# Altium PCB bridge (2).PcbDoc
Units mm, origin at the board's own origin, x right, y up, seen from the top; angles counter-clockwise.
Board outline 43.02 x 49.94 mm, 4 copper layers (Top Layer, Internal Plane 1, Internal Plane 2, Bottom Layer), stack 0.758 mm thick; 45 components, 64 nets, 108 pads, 354 vias.
Unrouted connection lines stored in the file: 5.
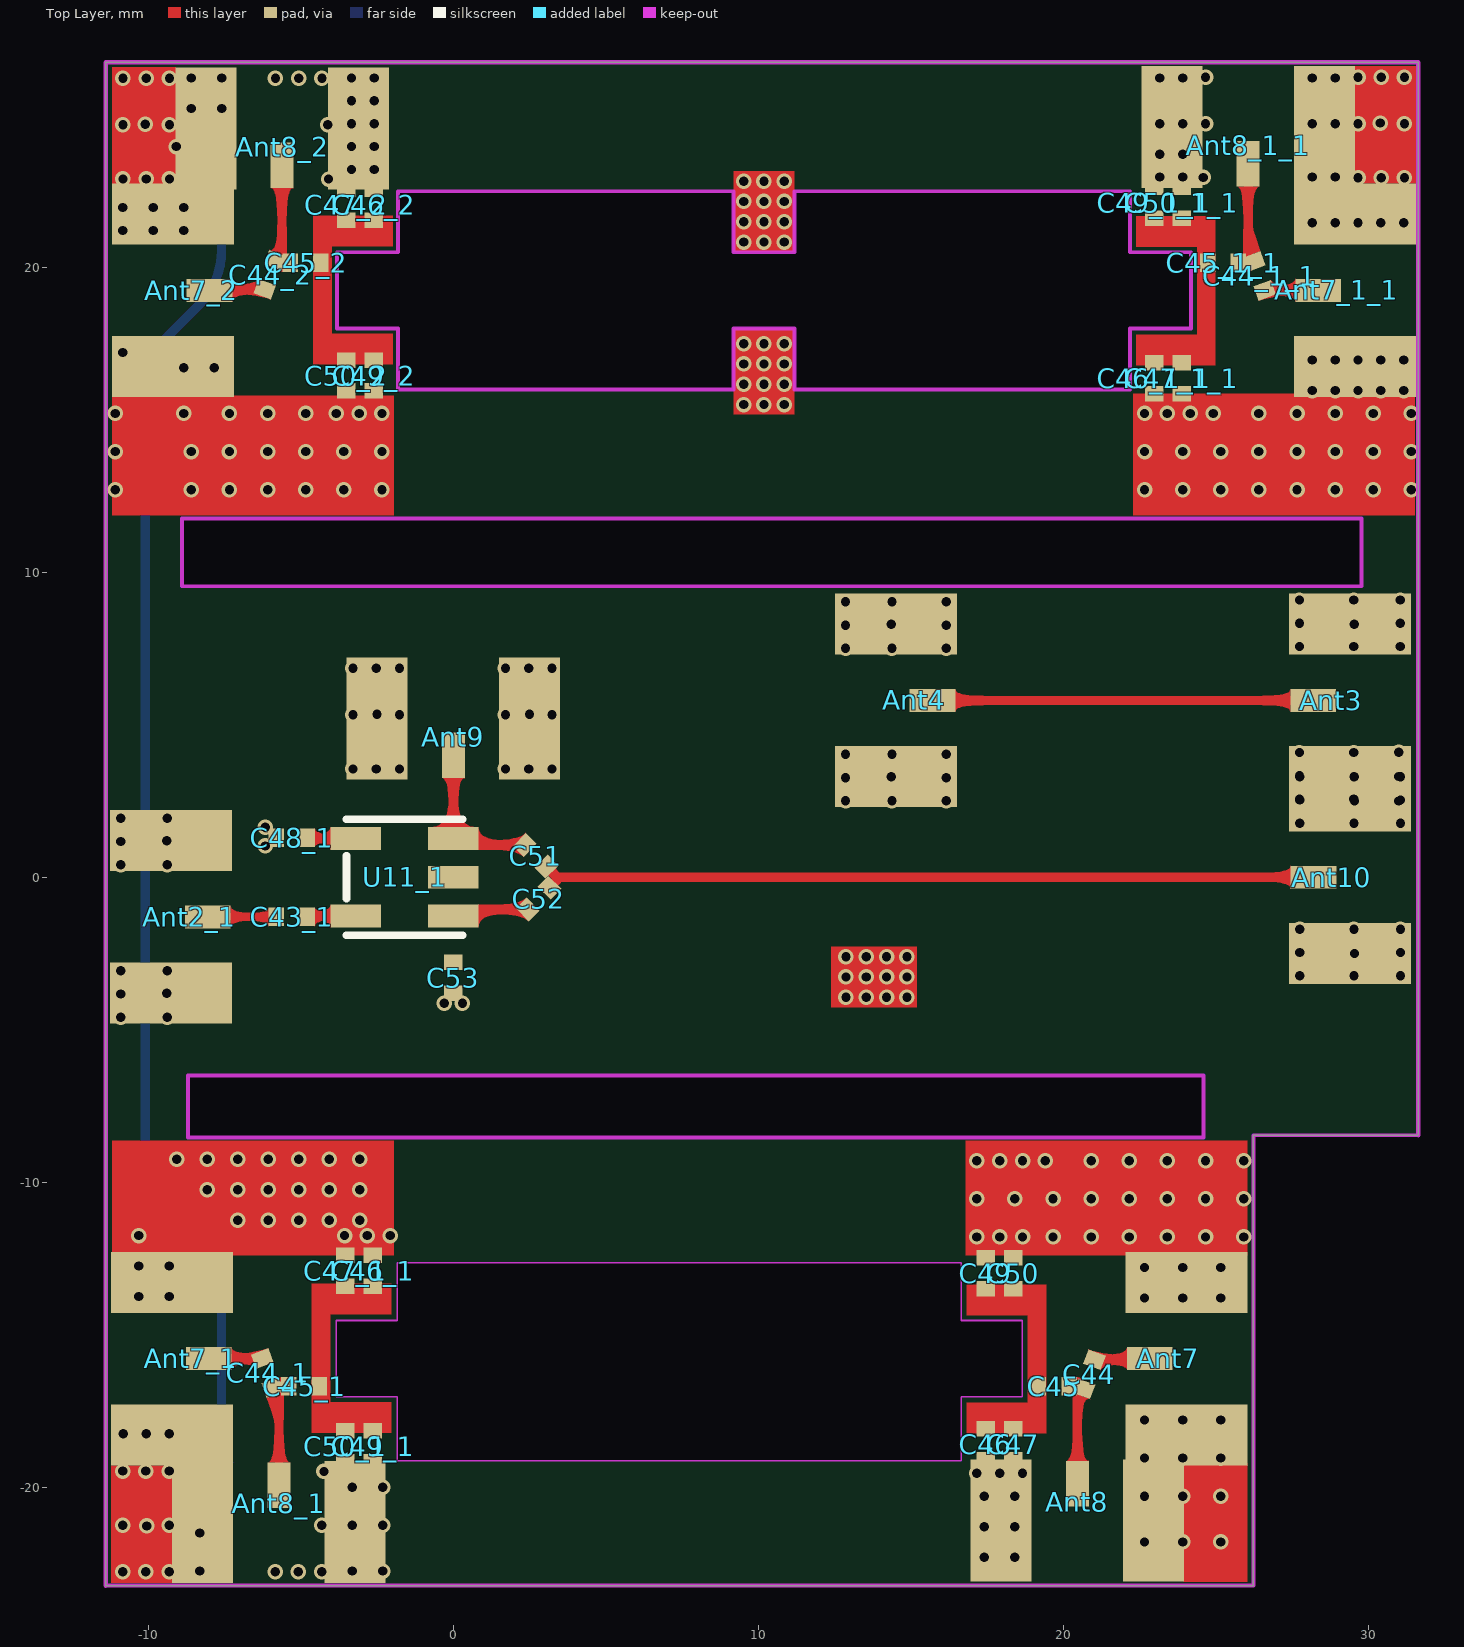
[diagram p0: Top Layer view]
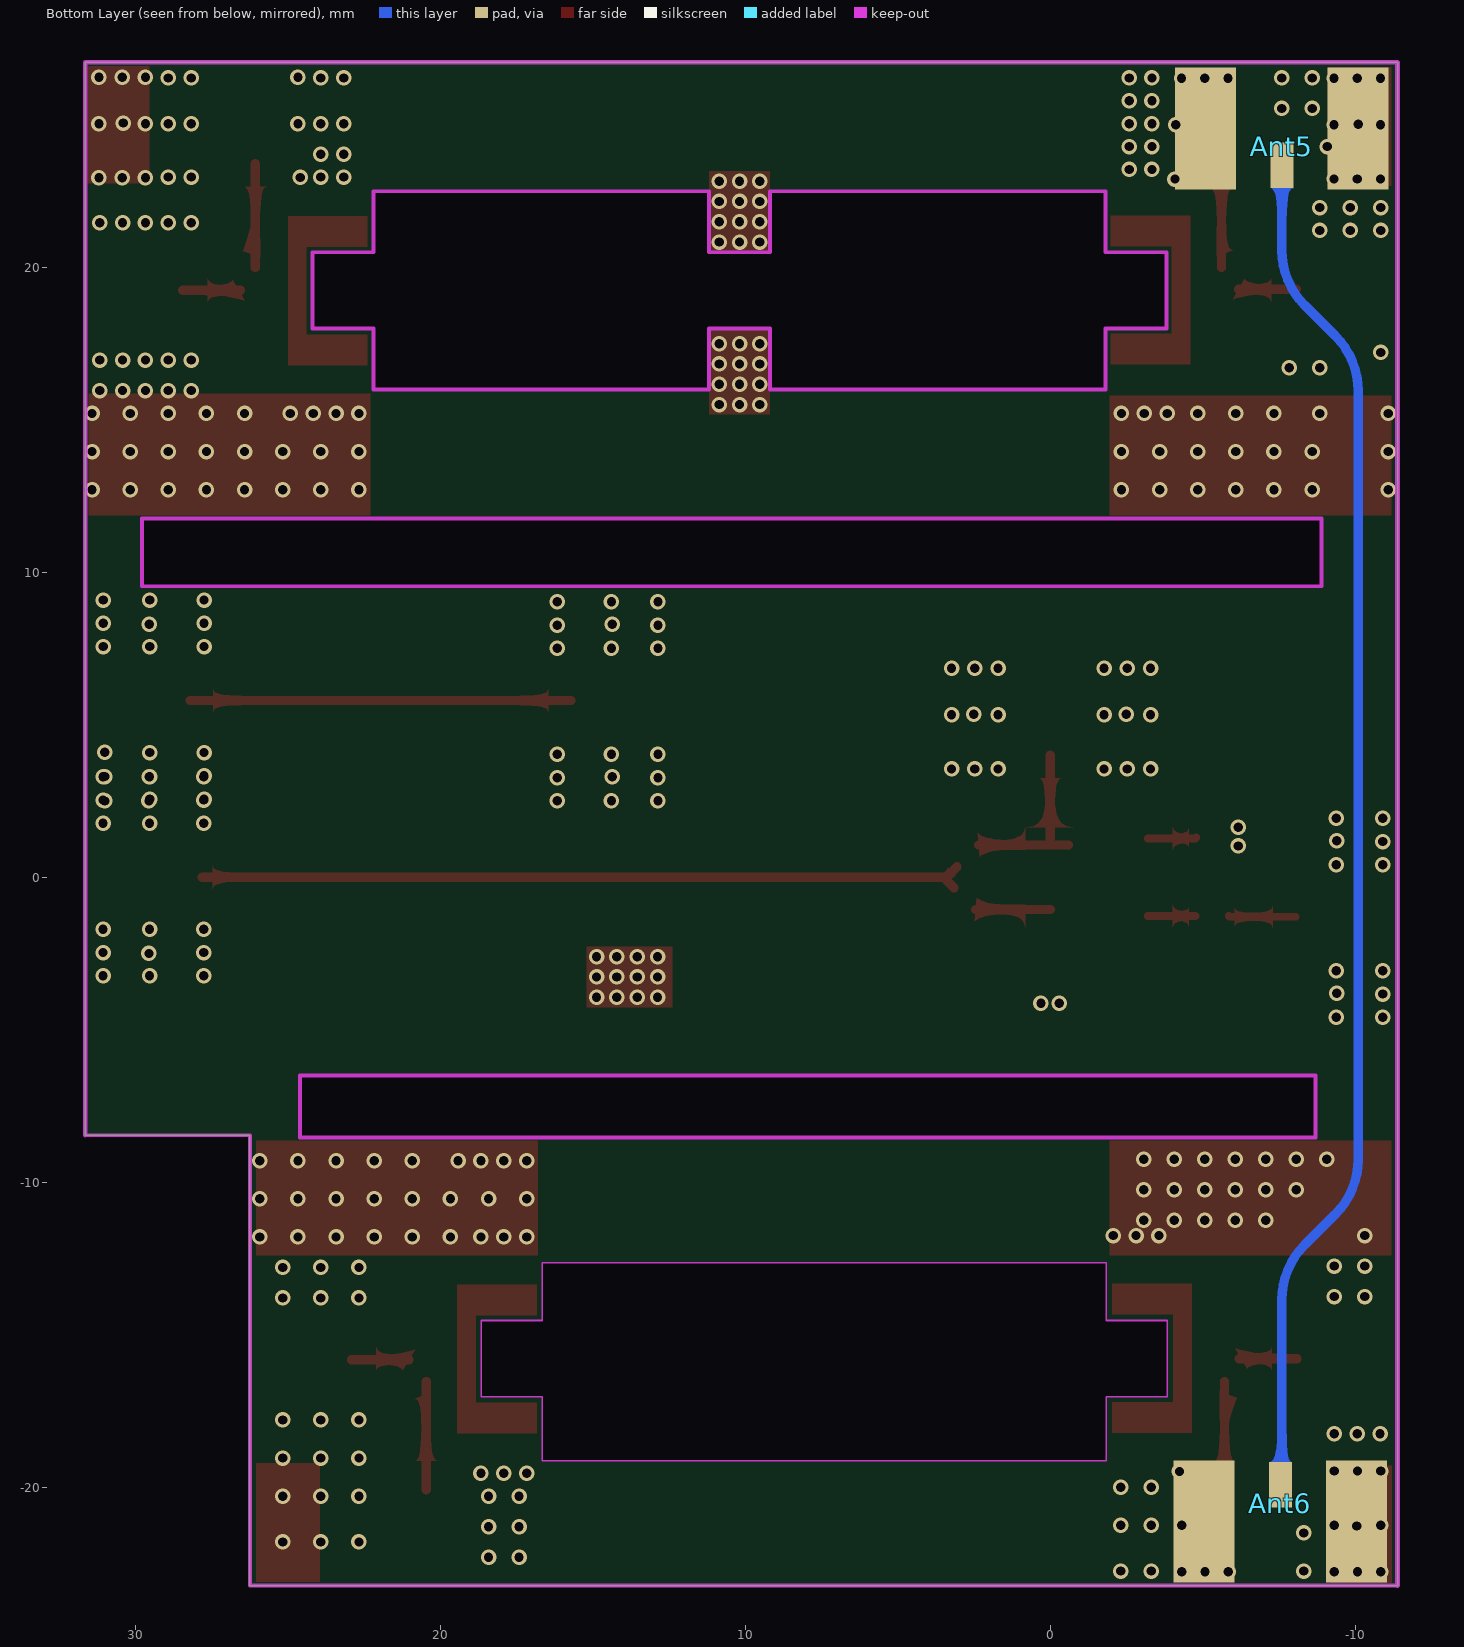
[diagram p1: Bottom Layer view, seen from below]
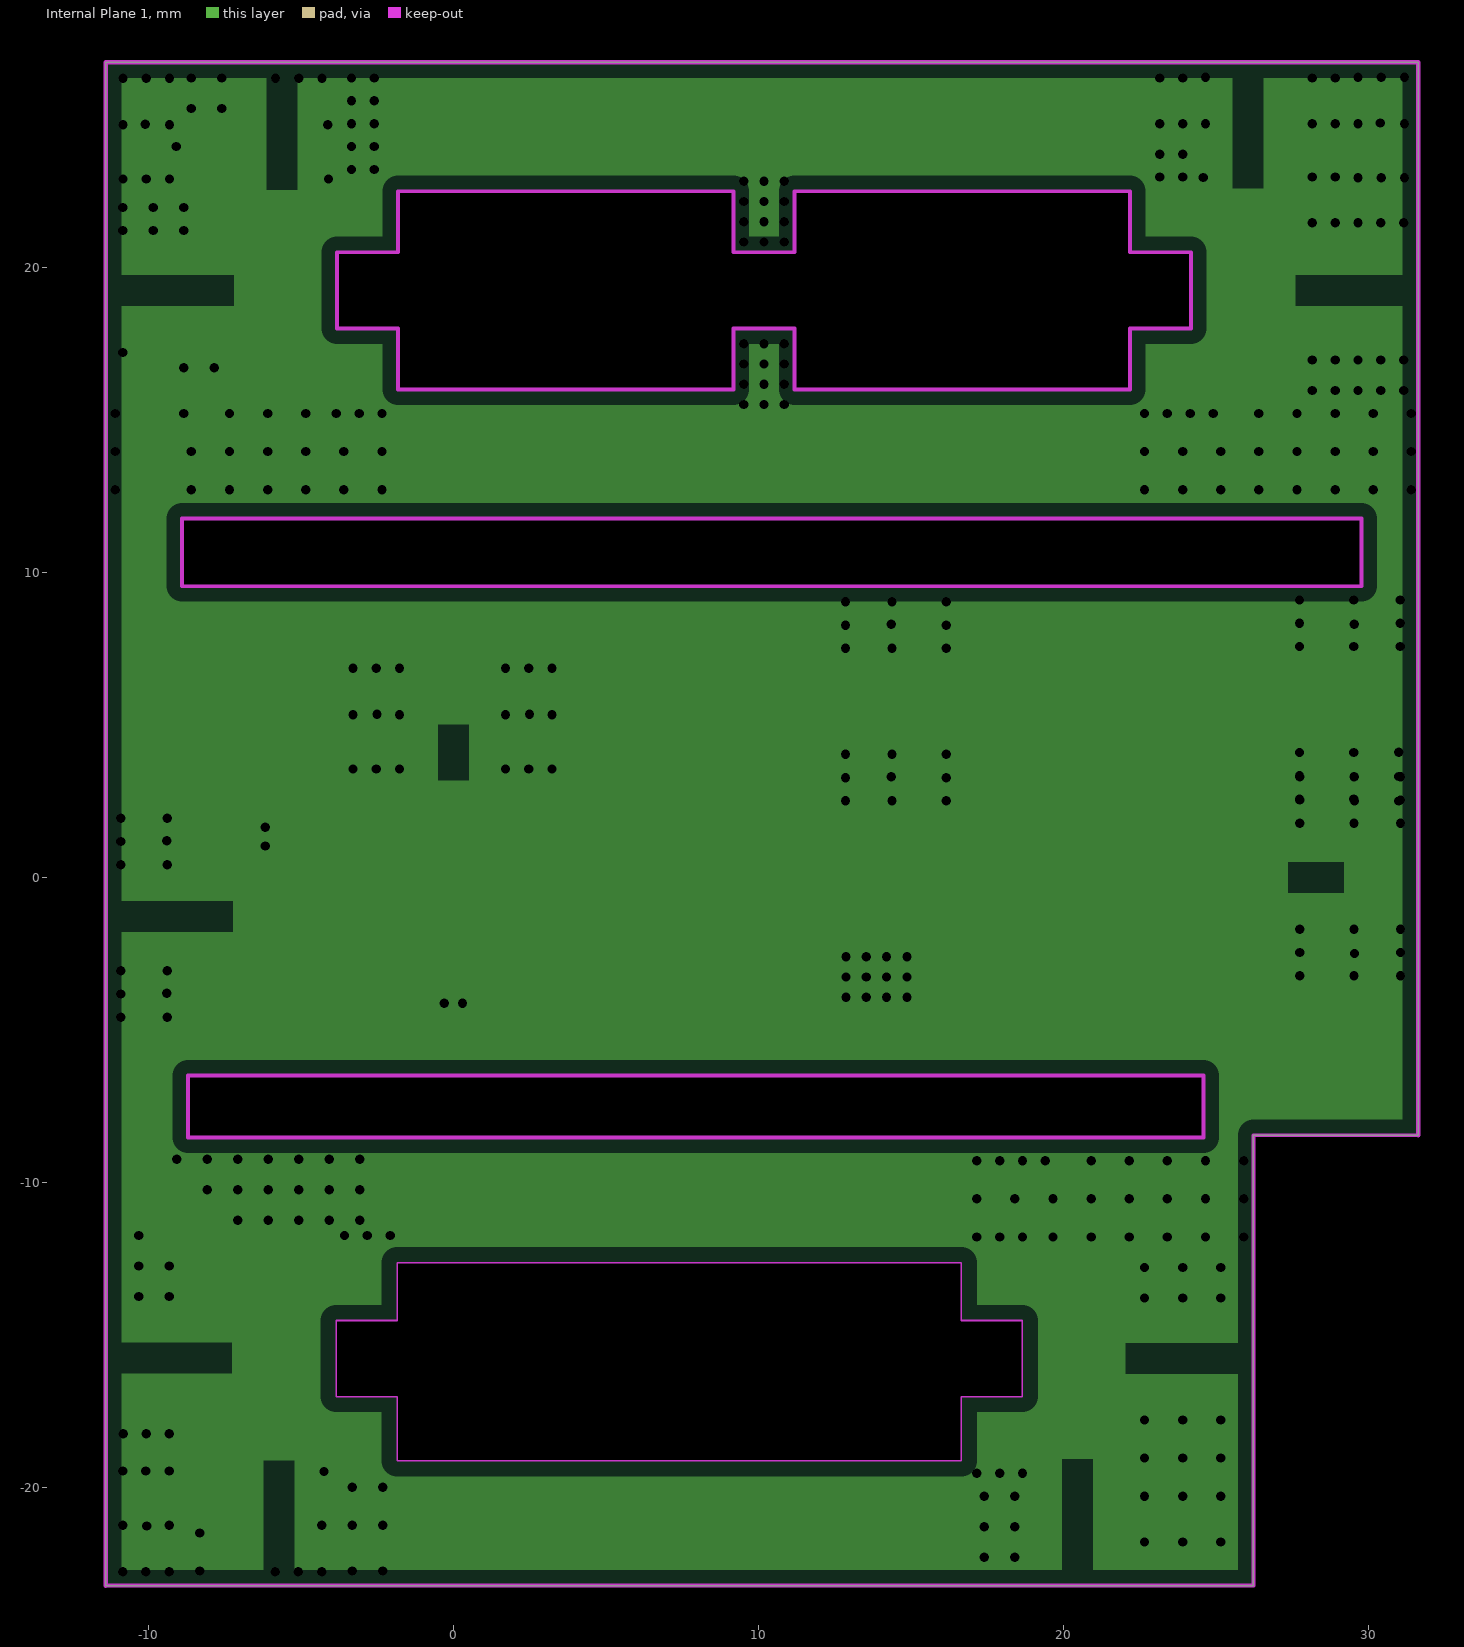
[diagram p2: Internal Plane 1, clearances drawn from the general rule]
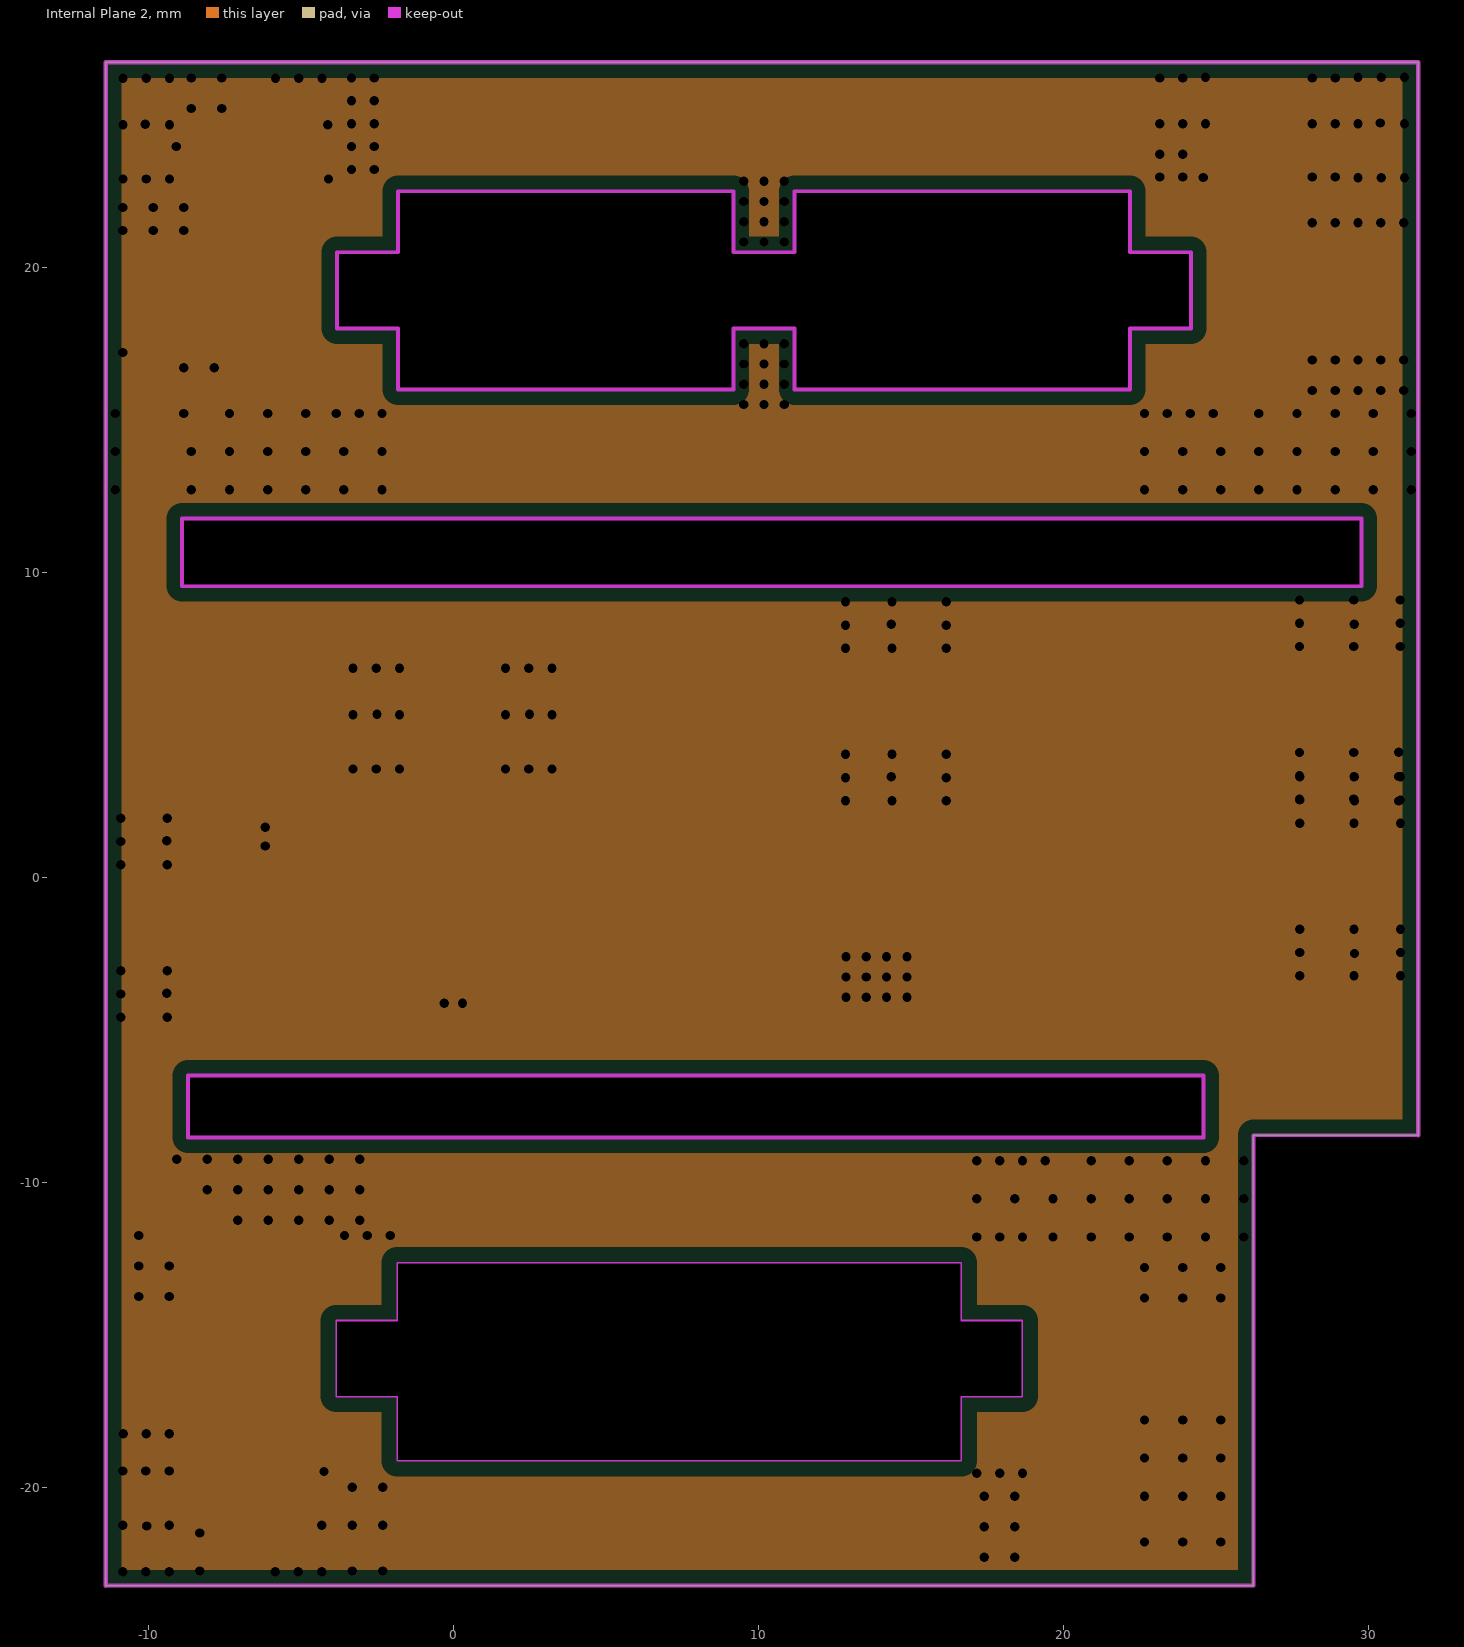
[diagram p3: Internal Plane 2, clearances drawn from the general rule]

## Layer stack, top to bottom
Top Solder: solder mask 0.0102, Solder Resist, Dk 3.8
Top Layer: signal copper 0.0356
Dielectric 1: prepreg 0.1803, Dk 4.6
Internal Plane 1: plane copper 0.036, net GND
Dielectric 3: core 0.254, Dk 4.6
Internal Plane 2: plane copper 0.036, net GND
Dielectric 4: prepreg 0.1803, Dk 4.6
Bottom Layer: signal copper 0.0356
Bottom Solder: solder mask 0.0102, Solder Resist, Dk 3.8

## Board outline
-11.391,-23.227 -11.391,26.717 31.634,26.717 31.634,-8.458 26.234,-8.458 26.234,-23.227
cut-out: 24.184,17.992 22.184,17.992 22.184,15.992 11.184,15.992 11.184,17.992 9.184,17.992 9.184,15.992 -1.816,15.992 -1.816,17.992 -3.816,17.992 -3.816,20.492 -1.816,20.492 -1.816,22.492 9.184,22.492 9.184,20.492 11.184,20.492 11.184,22.492 22.184,22.492 22.184,20.492 24.184,20.492
cut-out: -3.841,-17.033 -3.841,-14.533 -1.841,-14.533 -1.841,-12.633 16.659,-12.633 16.659,-14.533 18.659,-14.533 18.659,-17.033 16.659,-17.033 16.659,-19.133 -1.841,-19.133 -1.841,-17.033
cut-out: -8.7,-8.533 24.6,-8.533 24.6,-6.5 -8.7,-6.5
cut-out: -8.9,9.542 29.775,9.542 29.775,11.767 -8.9,11.767

## Design rules (kind name [scope] priority, off if disabled: settings)
Clearance [All] p1: gap=0.152 ignorepadtopadclearanceinfootprint=FALSE except(0: Arc-Hole Track-Hole SMDPad-Hole THPad-Hole Via-Hole Fill-Hole Poly-Hole Region-Hole Text-Hole)
DiffPairsRouting [All] p1: maxlimit=0.254 minlimit=0.254 mostfreqgap=0.254 toplayer_minwidth=0.152 toplayer_maxwidth=0.381 toplayer_prefwidth=0.381 bottomlayer_minwidth=0.152 bottomlayer_maxwidth=0.381 bottomlayer_prefwidth=0.381 maxuncoupledlength=12.7
MinimumSolderMaskSliver [All] p1 off: minsoldermaskwidth=0.254
PlaneClearance [All] p1: clearance=0.254
PlaneConnect [All] p1: planeconnectstyle=Direct reliefexpansion=0.508 reliefentries=4 reliefconductorwidth=0.254 reliefairgap=0.254
PolygonConnect [All] p1: connectstyle=Direct reliefconductorwidth=0.254 reliefentries=4 polygonreliefangle="90 Angle" airgapwidth=0.254
RoomDefinition mixer [InComponentClass('mixer')] p1 off: confinementstyle=ConfineIn formatcopy=TRUE lockcomponents=FALSE outline 38.622,20.131 177.534,20.131 177.534,30.164 38.622,30.164
RoomDefinition power [InComponentClass('power')] p2 off: confinementstyle=ConfineIn formatcopy=TRUE lockcomponents=FALSE outline 38.52,-21.703 98.083,-21.703 98.083,-15.607 38.52,-15.607
RoutingVias [All] p1: holewidth=0.305 width=0.508 viastyle="Through Hole" minholewidth=0.3 minwidth=0.5 maxholewidth=0.711 maxwidth=1.27
SilkToBoardRegionClearance [All] p1 off:
SilkToSilkClearance [All] p1 off: silktosilkclearance=0.254
SilkToSolderMaskClearance [IsPad] p1 off: minsilkscreentomaskgap=0.254 clearancetoexposedcopper=TRUE
SolderMaskExpansion [All] p1: expansion=0.102
Width [All] p1: maxlimit=1.524 minlimit=0.152 preferedwidth=0.152
23 further rules are at their usual default settings.

## Classes and differential pairs
component class mixer: R28
differential pair IF1: +IF1_P -IF1_N
differential pair IF2: +IF2_P -IF2_N

## Components (designator, comment, footprint, x,y, rotation, side; value= is the part's Value field where it differs from the comment)
Ant2_1 "Antenna" SMA-2 -9.252,1.2 r270 top (schematic designator Ant2)
Ant3 "Antenna" SMA-2 29.391,3.295 r90 top (schematic designator Ant2)
Ant4 "Antenna" SMA-2 14.509,8.295 r270 top (schematic designator Ant2)
Ant5 "Antenna" SMA-2 -10.098,24.544 r0 bottom (schematic designator Ant2)
Ant6 "Antenna" SMA-2 -5.051,-21.121 r180 bottom (schematic designator Ant2)
Ant7 "Antenna" SMA-2 24.034,-18.283 r90 top (schematic designator Ant2)
Ant7_1 "Antenna" SMA-2 -9.216,-13.283 r270 top (schematic designator Ant2)
Ant7_1_1 "Antenna" SMA-2 29.559,16.742 r90 top (schematic designator Ant2)
Ant7_2 "Antenna" SMA-2 -9.191,21.742 r270 top (schematic designator Ant2)
Ant8 "Antenna" SMA-2 17.959,-21.083 r0 top (schematic designator Ant2)
Ant8_1 "Antenna" SMA-2 -8.216,-21.133 r0 top (schematic designator Ant2)
Ant8_1_1 "Antenna" SMA-2 28.559,24.592 r180 top (schematic designator Ant2)
Ant8_2 "Antenna" SMA-2 -3.116,24.542 r180 top (schematic designator Ant2)
Ant9 "Antenna" SMA-2 2.5,5.2 r180 top (schematic designator Ant2)
Ant10 "Antenna" SMA-2 29.4,-2.5 r90 top (schematic designator Ant2)
C43_1 "1nF" 0402 -5.3,-1.3 r0 top (schematic designator C43)
C44 "1nF" 0402 20.85,-16.291 r250 top (schematic designator C43)
C44_1 "1nF" 0402 -6.091,-16.258 r110 top (schematic designator C43)
C44_1_1 "1nF" 0402 26.434,19.717 r290 top (schematic designator C43)
C44_2 "1nF" 0402 -6.007,19.75 r70 top (schematic designator C43)
C45 "1nF" 0402 19.684,-16.683 r0 top (schematic designator C43)
C45_1 "1nF" 0402 -4.891,-16.683 r180 top (schematic designator C43)
C45_1_1 "1nF" 0402 25.234,20.142 r0 top (schematic designator C43)
C45_2 "1nF" 0402 -4.841,20.142 r180 top (schematic designator C43)
C46 "1nF" 0402 17.459,-18.583 r270 top (schematic designator C43)
C46_1 "1nF" 0402 -2.641,-12.908 r90 top (schematic designator C43)
C46_1_1 "1nF" 0402 22.984,16.367 r270 top (schematic designator C43)
C46_2 "1nF" 0402 -2.616,22.042 r90 top (schematic designator C43)
C47 "1nF" 0402 18.359,-18.583 r270 top (schematic designator C43)
C47_1 "1nF" 0402 -3.541,-12.908 r90 top (schematic designator C43)
C47_1_1 "1nF" 0402 23.884,16.367 r270 top (schematic designator C43)
C47_2 "1nF" 0402 -3.516,22.042 r90 top (schematic designator C43)
C48_1 "10nF" 0402 -5.3,1.3 r0 top (schematic designator C48)
C49 "1nF" 0402 17.459,-12.983 r270 top (schematic designator C43)
C49_1 "1nF" 0402 -2.641,-18.659 r90 top (schematic designator C43)
C49_1_1 "1nF" 0402 22.984,22.118 r270 top (schematic designator C43)
C49_2 "1nF" 0402 -2.616,16.442 r90 top (schematic designator C43)
C50 "1nF" 0402 18.359,-12.983 r270 top (schematic designator C43)
C50_1 "1nF" 0402 -3.541,-18.659 r90 top (schematic designator C43)
C50_1_1 "1nF" 0402 23.884,22.118 r270 top (schematic designator C43)
C50_2 "1nF" 0402 -3.516,16.442 r90 top (schematic designator C43)
C51 "1nF" 0402 2.7,0.7 r135 top (schematic designator C43)
C52 "1nF" 0402 2.8,-0.7 r225 top (schematic designator C43)
C53 "1nF" 0402 0,-3.3 r90 top (schematic designator C43)
U11_1 "TCM1-1-13M+" TCM-63AX+ -1.6,0 r270 top (schematic designator U11)

## Footprints (in the part's own frame and the unit in brackets; to place one, negate y for a bottom-side part, rotate by r counter-clockwise, add the part's x,y. Pads: shape width x height; smd on the part's side, far side on the other; paste and mask are expansions set on the pad)
0402 [mil] "0402-RES"
  rect 20x24 smd: 1(-19.68,0) 2(20,0)
SMA-2 [mm]
  rect 0.75x1.5 smd: 1(2.5,1.2)
  rect 2x4 smd: GND(0,0) GND(5,0)
  Top Layer pour cut-out: 1,2 4,2 4,-2 1,-2
TCM-63AX+ [mm]
  rect 0.75x1.65 smd: 1(-1.27,1.6) 2(0,1.6) 3(1.27,1.6) 4(1.27,-1.6) 5(-1.27,-1.6)
  silkscreen extent -1.9,-1.9 1.9,1.9

## Part data
C43_1 C44 C44_1 C44_1_1 C44_2 C45 C45_1 C45_1_1 C45_2 C46 C46_1 C46_1_1 C46_2 C47 C47_1 C47_1_1 C47_2 C48_1 C49 C49_1 C49_1_1 C49_2 C50 C50_1 C50_1_1 C50_2 C51 C52 C53: library part CAP0402-CAP, "<b>Capacitor</b> / Standard 0603 ceramic capacitor, and 0.1\" leaded capacitor."
U11_1: library part TCM-63AX+

## Via types
v1: diameter 0.508, hole 0.305, Top Layer to Bottom Layer, tented both sides, 354 vias

## Nets (pads, with @x,y where several pads share a name; then routed paths per layer and width w, separated by ;. In a path a pad name is that pad's centre, name@x,y a point inside that pad or via, vN(x,y) a via of type N, cw(c..) or ccw(c..) an arc to the next point about the centre after c; other vN are vias at no path point)
5V: Ant3.1 Ant4.1 Ant8.1 C44.2 C45.2 | length 16
  Top Layer w0.305: Ant4.1 Ant3.1 ; Ant8.1@20.459,-20.083 C44.2@20.459,-16.533
5V-MIXER: Ant7_1_1.1 C44_1_1.2 | length 1.9
  Top Layer w0.305: C44_1_1.2@26.546,19.242 Ant7_1_1.1@28.434,19.242
5VA: Ant7_1.1 C44_1.2 | length 1.9
  Top Layer w0.305: Ant7_1.1@-8.091,-15.783 C44_1.2@-6.203,-15.783
5VB: C46_1.1 C47_1.1 C49_1.2 C50_1.2
6V: C45.1 C46.1 C47.1 C49.2 C50.2
-3.3V: Ant5.1 Ant6.1 Ant7.1 C44.1 | length 46.8
  Top Layer w0.305: C44.1 Ant7.1@22.909,-15.821
  Bottom Layer w0.254: Ant6.1@-7.598,-19.874 ccw(c-7.551,-19.874) Ant6.1
  Bottom Layer w0.305: Ant6.1@-7.598,-19.874 -7.598,-13.854 ccw(c-10.138,-13.854) -8.342,-12.058 -9.356,-11.044 cw(c-7.56,-9.248) -10.1,-9.248 -10.1,15.948 cw(c-7.56,15.948) -9.356,17.744 -8.342,18.758 ccw(c-10.138,20.554) -7.598,20.554 Ant5.1
DETO: Ant8_1.1 Ant8_1_1.1 C44_1.1 C44_1_1.1 C44_2.2 C45_1.2 C45_1_1.2 C45_2.2 | length 10.3
  Top Layer w0.305: Ant8_1.1 C44_1.1@-5.716,-16.533 ; C44_2.2@-5.616,19.992 -5.616,23.542 ; C44_1_1.1@26.059,19.992 Ant8_1_1.1
GND: Ant2_1.GND Ant3.GND Ant4.GND Ant5.GND Ant6.GND Ant7.GND Ant7_1.GND Ant7_1_1.GND Ant7_2.GND Ant8.GND Ant8_1.GND Ant8_1_1.GND Ant8_2.1 Ant8_2.GND Ant9.GND Ant10.GND C46.2 C46_1.2 C46_1_1.2 C46_2.2 C47.2 C47_1.2 C47_1_1.2 C47_2.2 C48_1.1 C49.1 C49_1.1 C49_1_1.1 C49_2.1 C50.1 C50_1.1 C50_1_1.1 C50_2.1 C53.1
  other v1: -10.842,-22.772 -10.08,-22.772 -9.318,-22.772 -5.842,-22.772 -5.08,-22.772 -4.318,-22.772 -8.318,-22.748 -3.318,-22.748 -2.318,-22.748 17.411,-22.293 18.411,-22.293 22.661,-21.793 23.911,-21.793 25.161,-21.793 -8.318,-21.498 17.411,-21.293 18.411,-21.293 -10.051,-21.269 -10.842,-21.248 -9.318,-21.248 -4.318,-21.248 -3.318,-21.248 -2.318,-21.248 17.411,-20.293 18.411,-20.293 22.661,-20.293 23.911,-20.293 25.161,-20.293 -3.318,-19.998 -2.318,-19.998 17.161,-19.543 17.911,-19.543 18.661,-19.543 -4.241,-19.483 -10.842,-19.47 -10.08,-19.47 -9.318,-19.47 22.661,-19.043 23.911,-19.043 25.161,-19.043 -10.818,-18.248 -10.068,-18.248 -9.318,-18.248 22.661,-17.793 23.911,-17.793 25.161,-17.793 22.661,-13.793 23.911,-13.793 25.161,-13.793 -10.318,-13.748 -9.318,-13.748 22.661,-12.793 23.911,-12.793 25.161,-12.793 -10.318,-12.748 -9.318,-12.748 17.161,-11.793 17.911,-11.793 18.661,-11.793 19.661,-11.793 20.911,-11.793 22.161,-11.793 23.411,-11.793 24.661,-11.793 25.911,-11.793 -10.318,-11.748 -3.568,-11.748 -2.818,-11.748 -2.068,-11.748 -7.068,-11.248 -6.068,-11.248 -5.068,-11.248 -4.068,-11.248 -3.068,-11.248 17.161,-10.543 18.411,-10.543 19.661,-10.543 20.911,-10.543 22.161,-10.543 23.411,-10.543 24.661,-10.543 25.911,-10.543 -8.068,-10.248 -7.068,-10.248 -6.068,-10.248 -5.068,-10.248 -4.068,-10.248 -3.068,-10.248 17.161,-9.293 17.911,-9.293 18.661,-9.293 19.411,-9.293 20.911,-9.293 22.161,-9.293 23.411,-9.293 24.661,-9.293 25.911,-9.293 -9.068,-9.248 -8.068,-9.248 -7.068,-9.248 -6.068,-9.248 -5.068,-9.248 -4.068,-9.248 -3.068,-9.248 -10.903,-4.591 -9.379,-4.591 -0.3,-4.133 0.3,-4.133 12.873,-3.937 13.539,-3.937 14.205,-3.937 14.871,-3.937 -10.903,-3.829 -9.4,-3.8 12.873,-3.271 13.539,-3.271 14.205,-3.271 14.871,-3.271 27.749,-3.233 29.527,-3.233 31.051,-3.233 -10.903,-3.067 -9.379,-3.067 12.873,-2.605 13.539,-2.605 14.205,-2.605 14.871,-2.605 29.548,-2.5 27.749,-2.471 31.051,-2.471 27.749,-1.709 29.527,-1.709 31.051,-1.709 -10.903,0.409 -9.379,0.409 -6.17,1.025 -10.903,1.171 -9.4,1.2 -6.17,1.634 27.749,1.767 29.527,1.767 31.051,1.767 -10.903,1.933 -9.379,1.933 12.858,2.504 14.382,2.504 16.16,2.504 29.548,2.5 31,2.5 27.749,2.529 31.051,2.529 27.74,2.562 29.518,2.562 12.858,3.266 16.16,3.266 14.361,3.295 27.749,3.291 29.527,3.291 29.539,3.295 31,3.3 31.051,3.291 27.74,3.324 -3.291,3.549 -2.529,3.549 -1.767,3.549 1.709,3.549 2.471,3.549 3.233,3.549 12.858,4.028 14.382,4.028 16.16,4.028 27.74,4.086 29.518,4.086 31,4.1 -3.291,5.327 -1.767,5.327 1.709,5.327 3.233,5.327 -2.5,5.348 2.5,5.348 -3.291,6.851 -2.529,6.851 -1.767,6.851 1.709,6.851 2.471,6.851 3.233,6.851 12.858,7.504 14.382,7.504 16.16,7.504 27.74,7.562 29.518,7.562 31.042,7.562 12.858,8.266 16.16,8.266 14.361,8.295 29.539,8.295 27.74,8.324 31.042,8.324 12.858,9.028 14.382,9.028 16.16,9.028 27.74,9.086 29.518,9.086 31.042,9.086 -11.089,12.707 -8.589,12.707 -7.339,12.707 -6.089,12.707 -4.839,12.707 -3.589,12.707 -2.339,12.707 22.661,12.707 23.911,12.707 25.161,12.707 26.411,12.707 27.661,12.707 28.911,12.707 30.161,12.707 31.411,12.707 -11.089,13.957 -8.589,13.957 -7.339,13.957 -6.089,13.957 -4.839,13.957 -3.589,13.957 -2.339,13.957 22.661,13.957 23.911,13.957 25.161,13.957 26.411,13.957 27.661,13.957 28.911,13.957 30.161,13.957 31.411,13.957 -11.089,15.207 -8.839,15.207 -7.339,15.207 -6.089,15.207 -4.839,15.207 -3.839,15.207 -3.089,15.207 -2.339,15.207 22.661,15.207 23.411,15.207 24.161,15.207 24.911,15.207 26.411,15.207 27.661,15.207 28.911,15.207 30.161,15.207 31.411,15.207 9.517,15.497 10.183,15.497 10.849,15.497 28.161,15.957 28.911,15.957 29.661,15.957 30.411,15.957 31.161,15.957 9.517,16.163 10.183,16.163 10.849,16.163 -8.839,16.707 -7.839,16.707 9.517,16.829 10.183,16.829 10.849,16.829 28.161,16.957 28.911,16.957 29.661,16.957 30.411,16.957 31.161,16.957 -10.839,17.207 9.517,17.495 10.183,17.495 10.849,17.495 9.517,20.825 10.183,20.825 10.849,20.825 -10.839,21.207 -9.839,21.207 -8.839,21.207 28.161,21.457 28.911,21.457 29.661,21.457 30.411,21.457 31.161,21.457 9.517,21.491 10.183,21.491 10.849,21.491 -10.839,21.957 -9.839,21.957 -8.839,21.957 9.517,22.157 10.183,22.157 10.849,22.157 9.517,22.823 10.183,22.823 10.849,22.823 -10.831,22.893 -10.069,22.893 -9.307,22.893 -4.091,22.892 29.661,22.929 30.423,22.929 31.185,22.929 23.161,22.957 23.911,22.957 24.584,22.942 28.161,22.957 28.911,22.957 -3.339,23.207 -2.589,23.207 23.161,23.707 23.911,23.707 -9.089,23.957 -3.339,23.957 -2.589,23.957 -10.831,24.671 -9.307,24.671 -4.116,24.667 -10.098,24.692 -3.339,24.707 -2.589,24.707 23.161,24.707 23.911,24.707 24.661,24.707 28.161,24.707 28.911,24.707 29.661,24.707 31.185,24.707 30.394,24.728 -8.589,25.207 -7.589,25.207 -3.339,25.457 -2.589,25.457 -10.831,26.195 -10.069,26.195 -9.307,26.195 -8.589,26.207 -7.589,26.207 -5.831,26.195 -5.069,26.195 -4.307,26.195 -3.339,26.207 -2.589,26.207 23.161,26.207 23.911,26.207 28.161,26.207 28.911,26.207 24.661,26.231 29.661,26.231 30.423,26.231 31.185,26.231
IF1_N: 
IF1_P: 
IF2_N: 
IF2_P: 
IF3+: 
IF3-: 
NetAnt1_1: 
NetAnt2_1: 
NetC1_1: 
NetC1_2: 
NetC2_1: 
NetC4_1: 
NetC7_2: 
NetC11_2: 
NetC15_2: 
NetC18_2: 
NetC24_2: 
NetC28_1: 
NetC28_2: 
NetC29_1: 
NetC30_1: 
NetC30_2: 
NetC31_1: 
NetC31_2: 
NetC43_2: 
NetC44_1: 
NetC44_2: 
NetC45_2: 
NetC46_1: 
NetC46_2: 
NetC47_2: 
NetC48_2: 
NetC49_1: 
NetC49_2: 
NetC50_1: 
NetC50_2: 
NetC51_2: 
NetC53_2: 
NetC57_1: 
NetC57_2: 
NetC58_1: 
NetC58_2: 
NetC59_1: 
NetC59_2: 
NetC60_1: 
NetC60_2: 
NetC64_2: 
NetC66_2: 
NetR2_1: 
NetR4_1: 
NetR5_1: 
NetR10_1: 
NetR15_1: 
NetR24_1: 
VSET: 
VSYS: 
pads on no net: Ant2_1.1 Ant7_2.1 Ant9.1 Ant10.1 C43_1.1 C43_1.2 C44_2.1 C45_1.1 C45_1_1.1 C45_2.1 C46_1_1.1 C46_2.1 C47_1_1.1 C47_2.1 C48_1.2 C49_1_1.2 C49_2.2 C50_1_1.2 C50_2.2 C51.1 C51.2 C52.1 C52.2 C53.2 U11_1.1 U11_1.2 U11_1.3 U11_1.4 U11_1.5
copper on no net: | length 40.7
  Top Layer w0.254: -8.052,-1.3 -5.89,-1.3 -5.86,-1.27 ; -4.792,1.3 -4.762,1.27 -3.2,1.27 ; -4.762,-1.27 -3.2,-1.27
  Top Layer w0.305: -8.066,19.28 -6.178,19.28 ; -0.6,1.059 2.341,1.059 ; 0,-1.059 2.441,-1.059 ; 0,1.27 0,4 ; 3.054,0.346 3.4,0 ; 3.154,-0.346 3.4,-0.1 3.4,0 ; 27.8,0 3.675,0 3.4,0

## Polygon pours and split planes (outlines as drawn)
GND on Internal Plane 1 (split plane): 31.124,19.742 27.613,19.742 27.613,18.742 31.124,18.742 31.124,-7.948 26.234,-7.948 26.134,-7.957 26.039,-7.986 25.95,-8.034 25.873,-8.097 25.81,-8.174 25.762,-8.263 25.733,-8.358 25.724,-8.458 25.724,-15.283 22.038,-15.283 22.038,-16.283 25.724,-16.283 25.724,-22.717 20.959,-22.717 20.959,-19.087 19.959,-19.087 19.959,-22.717 -5.216,-22.717 -5.216,-19.137 -6.216,-19.137 -6.216,-22.717 -10.881,-22.717 -10.881,-16.271 -7.267,-16.271 -7.267,-15.271 -10.881,-15.271 -10.881,-1.788 -7.228,-1.788 -7.228,-0.788 -10.881,-0.788 -10.881,18.742 -7.195,18.742 -7.195,19.742 -10.881,19.742 -10.881,26.207 -6.116,26.207 -6.116,22.546 -5.116,22.546 -5.116,26.207 25.559,26.207 25.559,22.596 26.559,22.596 26.559,26.207 31.124,26.207
GND on Internal Plane 2 (split plane): 31.124,-7.948 26.234,-7.948 26.134,-7.957 26.039,-7.986 25.95,-8.034 25.873,-8.097 25.81,-8.174 25.762,-8.263 25.733,-8.358 25.724,-8.458 25.724,-22.717 -10.881,-22.717 -10.881,26.207 31.124,26.207

## Keep-outs
Keep-Out Layer:
  lines w0.051: -3.841,-17.033 -1.841,-17.033 -1.841,-19.133 16.659,-19.133 16.659,-17.033 18.659,-17.033 18.659,-14.533 16.659,-14.533 16.659,-12.633 -1.841,-12.633 -1.841,-14.533 -3.841,-14.533 -3.841,-17.033
  lines w0.127: -11.391,-23.227 26.234,-23.227 26.234,-8.458 31.634,-8.458 ; -8.9,9.542 29.775,9.542 29.775,11.767 -8.9,11.767 -8.9,9.542 ; -8.7,-8.533 -8.7,-6.5 24.6,-6.5 24.6,-8.533 -8.7,-8.533 ; -3.816,17.992 -1.816,17.992 -1.816,15.992 9.184,15.992 9.184,17.992 11.184,17.992 11.184,15.992 22.184,15.992 22.184,17.992 24.184,17.992 24.184,20.492 22.184,20.492 22.184,22.492 11.184,22.492 11.184,20.492 9.184,20.492 9.184,22.492 -1.816,22.492 -1.816,20.492 -3.816,20.492 -3.816,17.992
  lines w0.152: -11.391,-23.227 -11.391,26.717 31.634,26.717 31.634,-8.458

## Other copper
Top Layer:
  region net GND: -1.941,-8.633 -11.191,-8.633 -11.191,-12.408 -1.941,-12.408
  region net GND: 26.034,-19.208 23.934,-19.208 23.934,-23.108 26.034,-23.108
  region net GND: -9.191,-19.283 -11.216,-19.283 -11.216,-23.133 -9.191,-23.133
  rectangle net GND: -11.191,22.667 -9.091,26.567
  region net GND: 26.034,-8.633 16.784,-8.633 16.784,-12.408 26.034,-12.408
  rectangle net GND: 29.534,22.742 31.559,26.592
  rectangle net GND: 22.284,11.867 31.534,15.867
  region net GND: -1.941,15.792 -11.191,15.792 -11.191,11.867 -1.941,11.867
  rectangle net GND: 9.184,20.492 11.184,23.156
  rectangle net GND: 9.184,15.164 11.184,17.992
  region net GND: 15.204,-4.27 15.204,-2.27 12.376,-2.27 12.376,-4.27
  region net 6V: 16.834,-17.233 18.834,-17.233 18.834,-14.358 16.834,-14.358 16.834,-13.358 19.434,-13.358 19.434,-18.233 16.834,-18.233
  region net 5VB: -2.041,-14.333 -4.041,-14.333 -4.041,-17.208 -2.041,-17.208 -2.041,-18.208 -4.641,-18.208 -4.641,-13.333 -2.041,-13.333
  region: -1.991,20.692 -3.991,20.692 -3.991,17.817 -1.991,17.817 -1.991,16.817 -4.591,16.817 -4.591,21.692 -1.991,21.692
  region: 22.384,17.792 24.384,17.792 24.384,20.667 22.384,20.667 22.384,21.667 24.984,21.667 24.984,16.792 22.384,16.792
Internal Plane 1 (plane layer: these items are gaps in the copper):
  region: -6.216,-19.137 -6.216,-23.201 -5.216,-23.201 -5.216,-19.137
  region: 19.959,-19.087 19.959,-23.151 20.959,-23.151 20.959,-19.087
  rectangle: 22.038,-16.283 26.102,-15.283
  region: -7.195,19.742 -11.259,19.742 -11.259,18.742 -7.195,18.742
  region: -5.116,22.546 -5.116,26.61 -6.116,26.61 -6.116,22.546
  region: 26.559,22.596 26.559,26.66 25.559,26.66 25.559,22.596
  rectangle: 27.613,18.742 31.677,19.742
  region: -7.228,-0.788 -11.292,-0.788 -11.292,-1.788 -7.228,-1.788
  region: -7.267,-15.271 -11.331,-15.271 -11.331,-16.271 -7.267,-16.271
  region: 0.512,3.176 0.512,5 -0.488,5 -0.488,3.176
  rectangle: 27.376,-0.512 29.2,0.488

## Silkscreen, mask and mechanical layers (free items; w line width, h text height)
Top Solder:
  rectangle: 9.184,20.492 11.184,23.156
  rectangle: 9.184,15.164 11.182,17.992
  region: 15.204,-4.27 15.204,-2.272 12.376,-2.272 12.376,-4.27
  region: 31.775,-4.875 31.775,8.425 -11.471,8.425 -11.471,-4.875
  region: -1.941,-23.208 -11.341,-23.208 -11.341,-11.033 -1.941,-11.033 -1.941,-15.459 -4.841,-15.459 -4.841,-16.259 -1.941,-16.259
  region: 16.759,-11.283 26.159,-11.283 26.159,-23.133 16.759,-23.133 16.759,-16.183 19.659,-16.183 19.659,-15.383 16.759,-15.383
  region: -1.916,14.742 -11.316,14.742 -11.316,26.592 -1.916,26.592 -1.916,19.642 -4.816,19.642 -4.816,18.842 -1.916,18.842
  region: 22.284,26.667 31.684,26.667 31.684,14.492 22.284,14.492 22.284,18.918 25.184,18.918 25.184,19.718 22.284,19.718